# Altium PCB UC-526.PcbDoc (part 1 of 3)
Units mil, origin at the board's own origin, x right, y up, seen from the top; angles counter-clockwise.
Board outline 3149.61 x 3149.61 mil, 2 copper layers (Top Layer, Bottom Layer); 464 components, 208 nets, 2160 pads, 392 vias.
Unrouted connection lines stored in the file: 5.
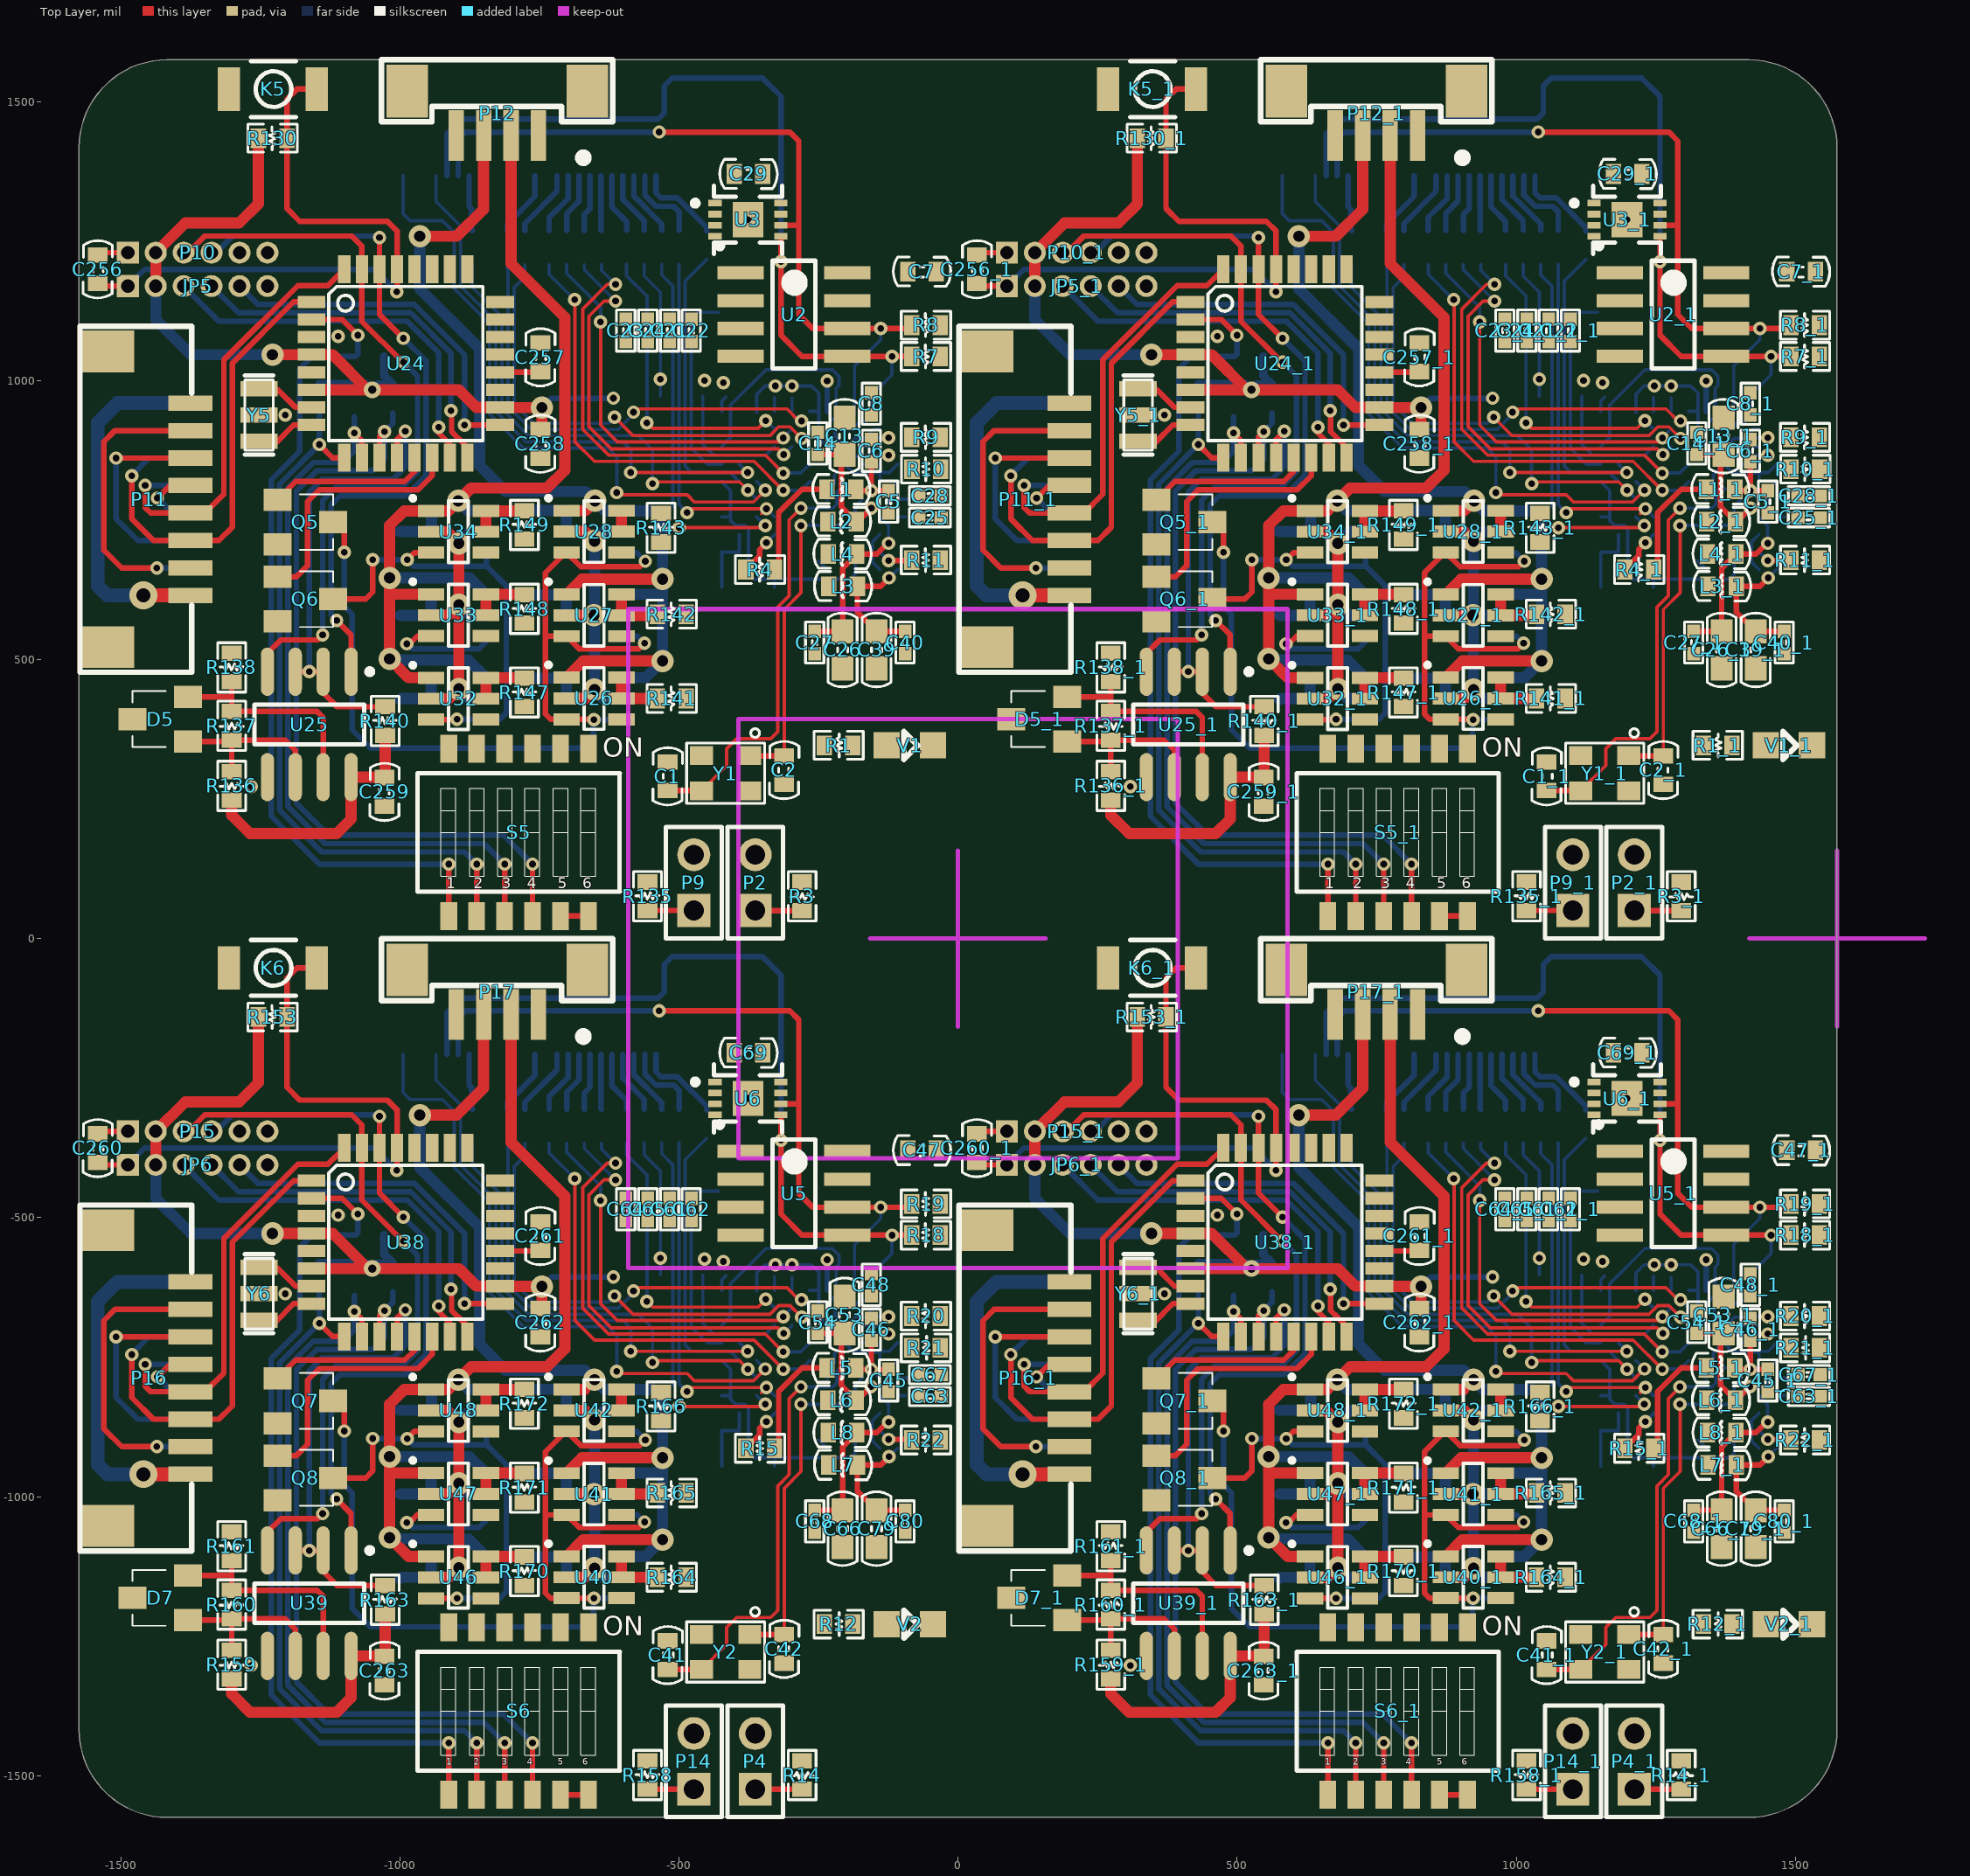
[diagram p0: Top Layer view]
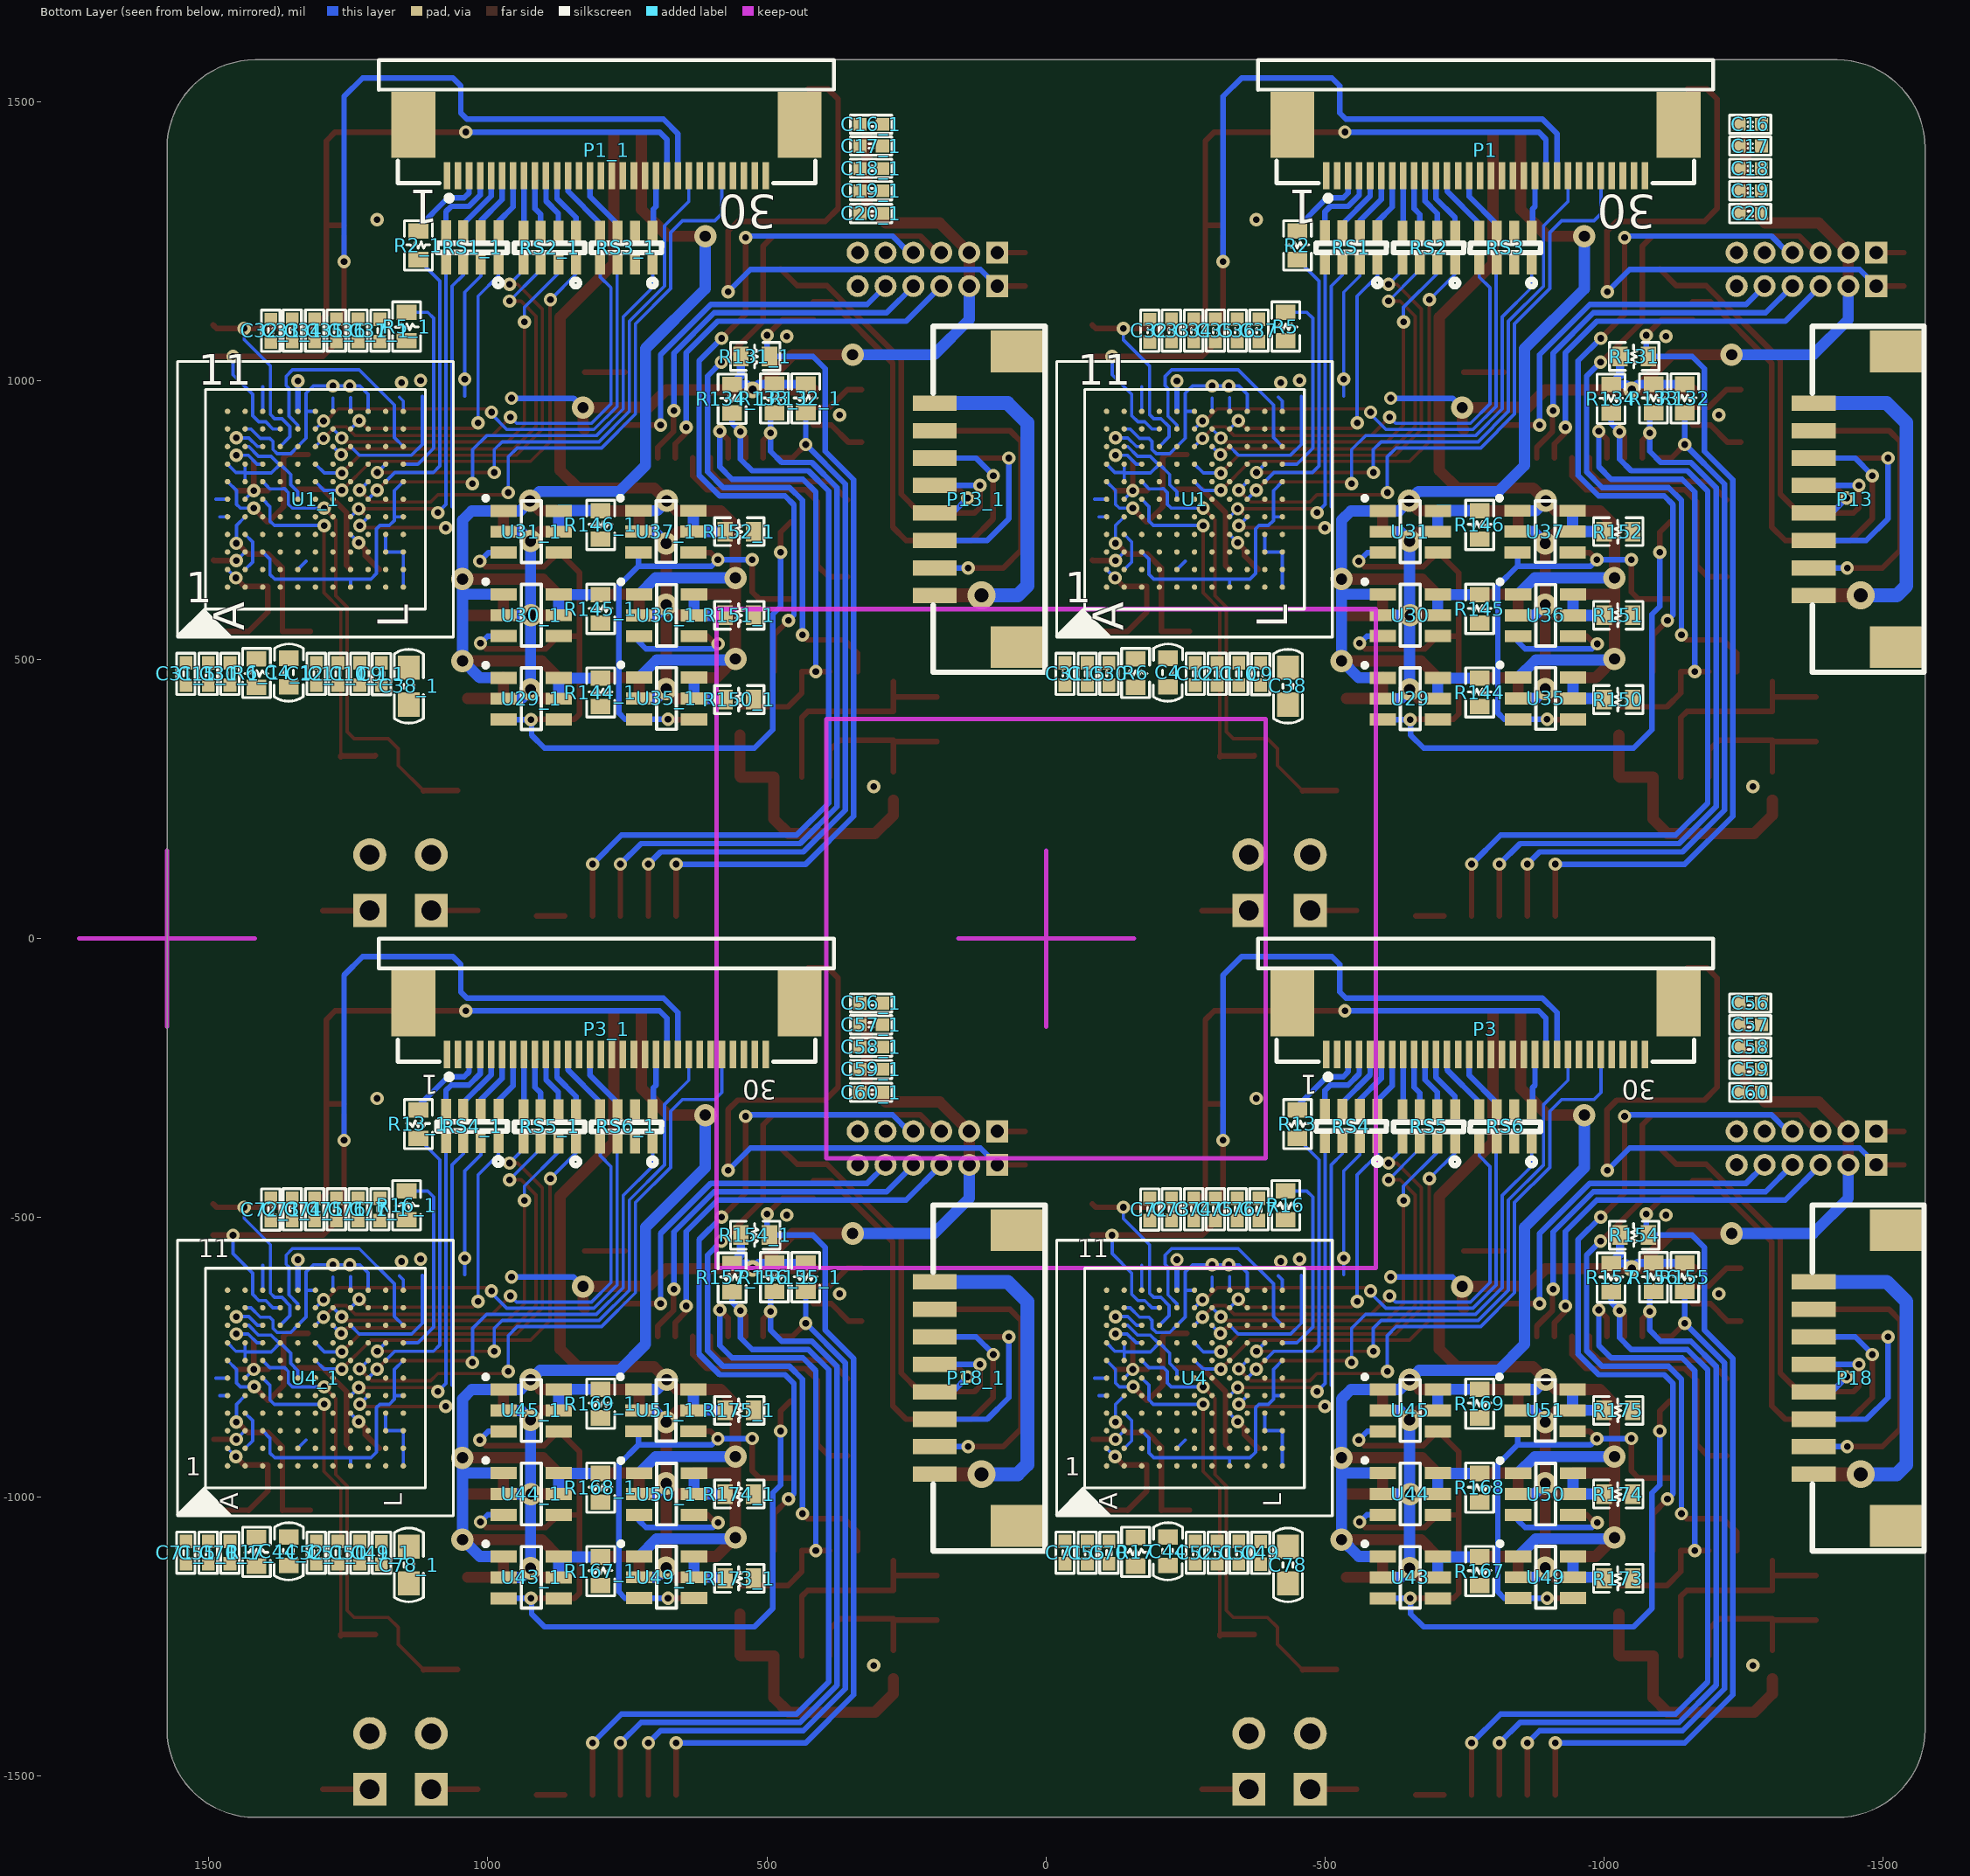
[diagram p1: Bottom Layer view, seen from below]

## Layer stack, top to bottom
Top Layer: signal copper 1.4
Dielectric: dielectric 12.6, FR-4, Dk 4.8
Bottom Layer: signal copper 1.4

## Board outline
-1574.8,-1417.32 -1574.8,1417.32 cw(c-1417.32,1417.32) -1417.32,1574.8 1417.32,1574.8 cw(c1417.32,1417.32) 1574.8,1417.32 1574.8,-1417.32 cw(c1417.32,-1417.32) 1417.32,-1574.8 -1417.32,-1574.8 cw(c-1417.32,-1417.32)

## Design rules (kind name [scope] priority, off if disabled: settings)
Clearance [All] p1: gap=5
DiffPairsRouting [All] p1: maxlimit=10 minlimit=10 mostfreqgap=10 maxuncoupledlength=500
PolygonConnect [All] p1: connectstyle=Relief reliefconductorwidth=10 reliefentries=4 polygonreliefangle="90 Angle"
RoutingVias [All] p1: holewidth=28 width=50 viastyle="Through Hole" minholewidth=28 minwidth=50 maxholewidth=28 maxwidth=50
SilkscreenOverComponentPads [All] p1: minsilkscreentomaskgap=10
SolderMaskExpansion [All] p1: expansion=4
Width [All] p1: maxlimit=50 minlimit=6 preferedwidth=10
26 further rules are at their usual default settings.

## Classes and differential pairs
differential pair USB_DS4_DM: +USB_DS4_DM -USB_DS4_DM
differential pair USB_DS3_DM: +USB_DS3_DM -USB_DS3_DM
differential pair SST: +SST_P -SST_N

## Components (designator, comment, footprint, x,y, rotation, side; value= is the part's Value field where it differs from the comment)
C1 "12pF" 0603S-CAP -520.4,290.81 r270 top
C1_1 "12pF" 0603S-CAP 1054.6,290.81 r270 top (schematic designator C1)
C2 "12pF" 0603S-CAP -311.4,301.99 r90 top
C2_1 "12pF" 0603S-CAP 1263.6,301.99 r90 top (schematic designator C2)
C4 "0.1u" 0603S-CAP -218.4,476.81 r90 bottom
C4_1 "0.1u" 0603S-CAP 1356.6,476.81 r90 bottom (schematic designator C4)
C5 "0.1u" C0402 -124.4,782.99 r270 top
C5_1 "0.1u" C0402 1450.6,782.99 r270 top (schematic designator C5)
C6 "0.01u" C0402 -155.4,874.4 r90 top
C6_1 "0.01u" C0402 1419.6,874.4 r90 top (schematic designator C6)
C7 "0.1uF" 0603S-CAP -64.6,1195.4 r180 top
C7_1 "0.1uF" 0603S-CAP 1510.4,1195.4 r180 top (schematic designator C7)
C8 "0.1u" C0402 -155.4,958.4 r270 top
C8_1 "0.1u" C0402 1419.6,958.4 r270 top (schematic designator C8)
C9 "0.01u" C0402 -384.4,474.09 r270 bottom
C9_1 "0.01u" C0402 1190.6,474.09 r270 bottom (schematic designator C9)
C10 "0.01u" C0402 -345.4,474.4 r270 bottom
C10_1 "0.01u" C0402 1229.6,474.4 r270 bottom (schematic designator C10)
C11 "0.01u" C0402 -306.4,474.4 r270 bottom
C11_1 "0.01u" C0402 1268.6,474.4 r270 bottom (schematic designator C11)
C12 "0.01u" C0402 -267.4,474.4 r270 bottom
C12_1 "0.01u" C0402 1307.6,474.4 r270 bottom (schematic designator C12)
C13 "2.2u" C0805S-CAP -203.4,900.4 r90 top
C13_1 "2.2u" C0805S-CAP 1371.6,900.4 r90 top (schematic designator C13)
C14 "0.1u" C0402 -251.4,887.4 r90 top
C14_1 "0.1u" C0402 1323.6,887.4 r90 top (schematic designator C14)
C15 "0.01u" C0402 -73.9,474.4 r270 bottom
C15_1 "0.01u" C0402 1501.1,474.4 r270 bottom (schematic designator C15)
C16 "0.01u" C0402 -1261.71,1459.25 r180 bottom
C16_1 "0.01u" C0402 313.29,1459.25 r180 bottom (schematic designator C16)
C17 "0.01u" C0402 -1261.71,1420.32 r180 bottom
C17_1 "0.01u" C0402 313.29,1420.32 r180 bottom (schematic designator C17)
C18 "0.01u" C0402 -1261.71,1380.32 r180 bottom
C18_1 "0.01u" C0402 313.29,1380.32 r180 bottom (schematic designator C18)
C19 "0.01u" C0402 -1261.71,1340.32 r180 bottom
C19_1 "0.01u" C0402 313.29,1340.32 r180 bottom (schematic designator C19)
C20 "0.01u" C0402 -1261.71,1299.32 r180 bottom
C20_1 "0.01u" C0402 313.29,1299.32 r180 bottom (schematic designator C20)
C21 "0.1u" C0402 -516.9,1089.71 r90 top
C21_1 "0.1u" C0402 1058.1,1089.71 r90 top (schematic designator C21)
C22 "0.1u" C0402 -477.9,1089.71 r90 top
C22_1 "0.1u" C0402 1097.1,1089.71 r90 top (schematic designator C22)
C23 "0.1u" C0402 -595.32,1089.71 r90 top
C23_1 "0.1u" C0402 979.68,1089.71 r90 top (schematic designator C23)
C24 "0.1u" C0402 -555.9,1089.71 r90 top
C24_1 "0.1u" C0402 1019.1,1089.71 r90 top (schematic designator C24)
C25 "0.1u" C0402 -50.4,754.4 r180 top
C25_1 "0.1u" C0402 1524.6,754.4 r180 top (schematic designator C25)
C26 "22u" C0805S-CAP -206.9,517.4 r270 top
C26_1 "22u" C0805S-CAP 1368.1,517.4 r270 top (schematic designator C26)
C27 "0.1u" C0402 -256.9,530.58 r270 top
C27_1 "0.1u" C0402 1318.1,530.58 r270 top (schematic designator C27)
C28 "0.1u" C0402 -50.4,793.4 r180 top
C28_1 "0.1u" C0402 1524.6,793.4 r180 top (schematic designator C28)
C29 "0.1u" 0603S-CAP -375.4,1370.4 r180 top
C29_1 "0.1u" 0603S-CAP 1199.6,1370.4 r180 top (schematic designator C29)
C30 "0.1u" C0402 -112.82,474.4 r270 bottom
C30_1 "0.1u" C0402 1462.18,474.4 r270 bottom (schematic designator C30)
C31 "0.1u" C0402 -33.9,474.4 r270 bottom
C31_1 "0.1u" C0402 1541.1,474.4 r270 bottom (schematic designator C31)
C32 "0.1u" C0402 -185.9,1089.4 r90 bottom
C32_1 "0.1u" C0402 1389.1,1089.4 r90 bottom (schematic designator C32)
C33 "0.1u" C0402 -224.56,1089.71 r90 bottom
C33_1 "0.1u" C0402 1350.44,1089.71 r90 bottom (schematic designator C33)
C34 "0.1u" C0402 -264.48,1089.71 r90 bottom
C34_1 "0.1u" C0402 1310.52,1089.71 r90 bottom (schematic designator C34)
C35 "0.1u" C0402 -303.48,1089.71 r90 bottom
C35_1 "0.1u" C0402 1271.52,1089.71 r90 bottom (schematic designator C35)
C36 "0.1u" C0402 -342.48,1089.71 r90 bottom
C36_1 "0.1u" C0402 1232.52,1089.71 r90 bottom (schematic designator C36)
C37 "0.1u" C0402 -381.48,1089.71 r90 bottom
C37_1 "0.1u" C0402 1193.52,1089.71 r90 bottom (schematic designator C37)
C38 "22u" C0805S-CAP -433.4,452.4 r270 bottom
C38_1 "22u" C0805S-CAP 1141.6,452.4 r270 bottom (schematic designator C38)
C39 "22u" C0805S-CAP -145.9,517.4 r270 top
C39_1 "22u" C0805S-CAP 1429.1,517.4 r270 top (schematic designator C39)
C40 "0.1u" C0402 -94.9,530.58 r270 top
C40_1 "0.1u" C0402 1480.1,530.58 r270 top (schematic designator C40)
C41 "12pF" 0603S-CAP -520.4,-1283.99 r270 top
C41_1 "12pF" 0603S-CAP 1054.6,-1283.99 r270 top (schematic designator C41)
C42 "12pF" 0603S-CAP -311.4,-1272.81 r90 top
C42_1 "12pF" 0603S-CAP 1263.6,-1272.81 r90 top (schematic designator C42)
C44 "0.1u" 0603S-CAP -218.4,-1097.99 r90 bottom
C44_1 "0.1u" 0603S-CAP 1356.6,-1097.99 r90 bottom (schematic designator C44)
C45 "0.1u" C0402 -124.4,-791.81 r270 top
C45_1 "0.1u" C0402 1450.6,-791.81 r270 top (schematic designator C45)
C46 "0.01u" C0402 -155.4,-700.4 r90 top
C46_1 "0.01u" C0402 1419.6,-700.4 r90 top (schematic designator C46)
C47 "0.1uF" 0603S-CAP -64.6,-379.4 r180 top
C47_1 "0.1uF" 0603S-CAP 1510.4,-379.4 r180 top (schematic designator C47)
C48 "0.1u" C0402 -155.4,-620.4 r270 top
C48_1 "0.1u" C0402 1419.6,-620.4 r270 top (schematic designator C48)
C49 "0.01u" C0402 -384.4,-1100.71 r270 bottom
C49_1 "0.01u" C0402 1190.6,-1100.71 r270 bottom (schematic designator C49)
C50 "0.01u" C0402 -345.4,-1100.4 r270 bottom
C50_1 "0.01u" C0402 1229.6,-1100.4 r270 bottom (schematic designator C50)
C51 "0.01u" C0402 -306.4,-1100.4 r270 bottom
C51_1 "0.01u" C0402 1268.6,-1100.4 r270 bottom (schematic designator C51)
C52 "0.01u" C0402 -267.4,-1100.4 r270 bottom
C52_1 "0.01u" C0402 1307.6,-1100.4 r270 bottom (schematic designator C52)
C53 "2.2u" C0805S-CAP -203.4,-674.4 r90 top
C53_1 "2.2u" C0805S-CAP 1371.6,-674.4 r90 top (schematic designator C53)
C54 "0.1u" C0402 -251.4,-687.4 r90 top
C54_1 "0.1u" C0402 1323.6,-687.4 r90 top (schematic designator C54)
C55 "0.01u" C0402 -73.9,-1100.4 r270 bottom
C55_1 "0.01u" C0402 1501.1,-1100.4 r270 bottom (schematic designator C55)
C56 "0.01u" C0402 -1261.71,-115.56 r180 bottom
C56_1 "0.01u" C0402 313.29,-115.56 r180 bottom (schematic designator C56)
C57 "0.01u" C0402 -1261.71,-154.48 r180 bottom
C57_1 "0.01u" C0402 313.29,-154.48 r180 bottom (schematic designator C57)
C58 "0.01u" C0402 -1261.71,-194.48 r180 bottom
C58_1 "0.01u" C0402 313.29,-194.48 r180 bottom (schematic designator C58)
C59 "0.01u" C0402 -1261.71,-234.48 r180 bottom
C59_1 "0.01u" C0402 313.29,-234.48 r180 bottom (schematic designator C59)
C60 "0.01u" C0402 -1261.71,-275.48 r180 bottom
C60_1 "0.01u" C0402 313.29,-275.48 r180 bottom (schematic designator C60)
C61 "0.1u" C0402 -516.9,-485.09 r90 top
C61_1 "0.1u" C0402 1058.1,-485.09 r90 top (schematic designator C61)
C62 "0.1u" C0402 -477.9,-485.09 r90 top
C62_1 "0.1u" C0402 1097.1,-485.09 r90 top (schematic designator C62)
C63 "0.1u" C0402 -50.4,-820.4 r180 top
C63_1 "0.1u" C0402 1524.6,-820.4 r180 top (schematic designator C63)
C64 "0.1u" C0402 -595.32,-485.09 r90 top
C64_1 "0.1u" C0402 979.68,-485.09 r90 top (schematic designator C64)
C65 "0.1u" C0402 -555.9,-485.09 r90 top
C65_1 "0.1u" C0402 1019.1,-485.09 r90 top (schematic designator C65)
C66 "22u" C0805S-CAP -206.9,-1057.4 r270 top
C66_1 "22u" C0805S-CAP 1368.1,-1057.4 r270 top (schematic designator C66)
C67 "0.1u" C0402 -50.4,-781.4 r180 top
C67_1 "0.1u" C0402 1524.6,-781.4 r180 top (schematic designator C67)
C68 "0.1u" C0402 -256.9,-1044.22 r270 top
C68_1 "0.1u" C0402 1318.1,-1044.22 r270 top (schematic designator C68)
C69 "0.1u" 0603S-CAP -375.4,-204.4 r180 top
C69_1 "0.1u" 0603S-CAP 1199.6,-204.4 r180 top (schematic designator C69)
C70 "0.1u" C0402 -112.82,-1100.4 r270 bottom
C70_1 "0.1u" C0402 1462.18,-1100.4 r270 bottom (schematic designator C70)
C71 "0.1u" C0402 -33.9,-1100.4 r270 bottom
C71_1 "0.1u" C0402 1541.1,-1100.4 r270 bottom (schematic designator C71)
C72 "0.1u" C0402 -185.9,-485.4 r90 bottom
C72_1 "0.1u" C0402 1389.1,-485.4 r90 bottom (schematic designator C72)
C73 "0.1u" C0402 -224.56,-485.09 r90 bottom
C73_1 "0.1u" C0402 1350.44,-485.09 r90 bottom (schematic designator C73)
C74 "0.1u" C0402 -264.48,-485.09 r90 bottom
C74_1 "0.1u" C0402 1310.52,-485.09 r90 bottom (schematic designator C74)
C75 "0.1u" C0402 -303.48,-485.09 r90 bottom
C75_1 "0.1u" C0402 1271.52,-485.09 r90 bottom (schematic designator C75)
C76 "0.1u" C0402 -342.48,-485.09 r90 bottom
C76_1 "0.1u" C0402 1232.52,-485.09 r90 bottom (schematic designator C76)
C77 "0.1u" C0402 -381.48,-485.09 r90 bottom
C77_1 "0.1u" C0402 1193.52,-485.09 r90 bottom (schematic designator C77)
C78 "22u" C0805S-CAP -433.4,-1122.4 r270 bottom
C78_1 "22u" C0805S-CAP 1141.6,-1122.4 r270 bottom (schematic designator C78)
C79 "22u" C0805S-CAP -145.9,-1057.4 r270 top
C79_1 "22u" C0805S-CAP 1429.1,-1057.4 r270 top (schematic designator C79)
C80 "0.1u" C0402 -94.9,-1044.22 r270 top
C80_1 "0.1u" C0402 1480.1,-1044.22 r270 top (schematic designator C80)
C256 "0.1uF" C0603 -1541.4,1199.4 r90 top
C256_1 "0.1uF" C0603 33.6,1199.4 r90 top (schematic designator C256)
C257 "0.1uF" C0603 -748.4,1041.81 r90 top
C257_1 "0.1uF" C0603 826.6,1041.81 r90 top (schematic designator C257)
C258 "0.1uF" C0603 -748.4,886.81 r90 top
C258_1 "0.1uF" C0603 826.6,886.81 r90 top (schematic designator C258)
C259 "0.1u" C0603 -1027.4,263.01 r270 top
C259_1 "0.1u" C0603 547.6,263.01 r270 top (schematic designator C259)
C260 "0.1uF" C0603 -1541.4,-375.4 r90 top
C260_1 "0.1uF" C0603 33.6,-375.4 r90 top (schematic designator C260)
C261 "0.1uF" C0603 -748.4,-532.99 r90 top
C261_1 "0.1uF" C0603 826.6,-532.99 r90 top (schematic designator C261)
C262 "0.1uF" C0603 -748.4,-687.99 r90 top
C262_1 "0.1uF" C0603 826.6,-687.99 r90 top (schematic designator C262)
C263 "0.1u" C0603 -1027.4,-1311.79 r270 top
C263_1 "0.1u" C0603 547.6,-1311.79 r270 top (schematic designator C263)
D5 "SM712" SOT23-3 -1429.4,393.4 r90 top
D5_1 "SM712" SOT23-3 145.6,393.4 r90 top (schematic designator D5)
D7 "SM712" SOT23-3 -1429.4,-1181.4 r90 top
D7_1 "SM712" SOT23-3 145.6,-1181.4 r90 top (schematic designator D7)
JP5 "Header 3X2" MHDR1X6 -1487.4,1169.4 r0 top
JP5_1 "Header 3X2" MHDR1X6 87.6,1169.4 r0 top (schematic designator JP5)
JP6 "Header 3X2" MHDR1X6 -1487.4,-405.4 r0 top
JP6_1 "Header 3X2" MHDR1X6 87.6,-405.4 r0 top (schematic designator JP6)
K5 "SW-PB" 157SW -1306.4,1522.4 r180 top
K5_1 "SW-PB" 157SW 268.6,1522.4 r180 top (schematic designator K5)
K6 "SW-PB" 157SW -1306.4,-52.4 r180 top
K6_1 "SW-PB" 157SW 268.6,-52.4 r180 top (schematic designator K6)
L1 "磁珠" L0603 -208.99,805.4 r180 top
L1_1 "磁珠" L0603 1366.01,805.4 r180 top (schematic designator L1)
L2 "磁珠" L0603 -207.99,747.4 r0 top
L2_1 "磁珠" L0603 1367.01,747.4 r0 top (schematic designator L2)
L3 "磁珠" L0603 -205.99,631.4 r0 top
L3_1 "磁珠" L0603 1369.01,631.4 r0 top (schematic designator L3)
L4 "磁珠" L0603 -206.99,689.4 r0 top
L4_1 "磁珠" L0603 1368.01,689.4 r0 top (schematic designator L4)
L5 "磁珠" L0603 -208.99,-769.4 r180 top
L5_1 "磁珠" L0603 1366.01,-769.4 r180 top (schematic designator L5)
L6 "磁珠" L0603 -207.99,-827.4 r0 top
L6_1 "磁珠" L0603 1367.01,-827.4 r0 top (schematic designator L6)
L7 "磁珠" L0603 -205.99,-943.4 r0 top
L7_1 "磁珠" L0603 1369.01,-943.4 r0 top (schematic designator L7)
L8 "磁珠" L0603 -206.99,-885.4 r0 top
L8_1 "磁珠" L0603 1368.01,-885.4 r0 top (schematic designator L8)
P1 "30PIN" FH12-30S-0.5SH -787.4,1412.95 r180 bottom locked
P1_1 "30PIN" FH12-30S-0.5SH 787.6,1412.95 r180 bottom locked (schematic designator P1)
P2 "Header 2" HDR1X2 -363.4,50.4 r90 top
P2_1 "Header 2" HDR1X2 1211.6,50.4 r90 top (schematic designator P2)
P3 "30PIN" FH12-30S-0.5SH -787.4,-161.85 r180 bottom locked
P3_1 "30PIN" FH12-30S-0.5SH 787.6,-161.85 r180 bottom locked (schematic designator P3)
P4 "Header 2" HDR1X2 -363.4,-1524.4 r90 top
P4_1 "Header 2" HDR1X2 1211.6,-1524.4 r90 top (schematic designator P4)
P9 "Header 2" HDR1X2 -473.4,50.4 r90 top
P9_1 "Header 2" HDR1X2 1101.6,50.4 r90 top (schematic designator P9)
P10 "FTDI Basic" MHDR1X6 -1487.4,1229.4 r0 top
P10_1 "FTDI Basic" MHDR1X6 87.6,1229.4 r0 top (schematic designator P10)
P11 "Header 8" SH_1.25MM*8 -1523.06,787.4 r270 top locked
P11_1 "Header 8" SH_1.25MM*8 51.94,787.4 r270 top locked (schematic designator P11)
P12 "Header 4" SMT_1.25MM*4 -825.4,1479.4 r0 top
P12_1 "Header 4" SMT_1.25MM*4 749.6,1479.4 r0 top (schematic designator P12)
P13 "Header 8" SH_1.25MM*8 -1523.06,787.4 r90 bottom locked
P13_1 "Header 8" SH_1.25MM*8 51.94,787.4 r90 bottom locked (schematic designator P13)
P14 "Header 2" HDR1X2 -473.4,-1524.4 r90 top
P14_1 "Header 2" HDR1X2 1101.6,-1524.4 r90 top (schematic designator P14)
P15 "FTDI Basic" MHDR1X6 -1487.4,-345.4 r0 top
P15_1 "FTDI Basic" MHDR1X6 87.6,-345.4 r0 top (schematic designator P15)
P16 "Header 8" SH_1.25MM*8 -1523.06,-787.4 r270 top locked
P16_1 "Header 8" SH_1.25MM*8 51.94,-787.4 r270 top locked (schematic designator P16)
P17 "Header 4" SMT_1.25MM*4 -825.4,-95.4 r0 top
P17_1 "Header 4" SMT_1.25MM*4 749.6,-95.4 r0 top (schematic designator P17)
P18 "Header 8" SH_1.25MM*8 -1523.06,-787.4 r90 bottom locked
P18_1 "Header 8" SH_1.25MM*8 51.94,-787.4 r90 bottom locked (schematic designator P18)
Q5 "BSS138" "SOT-23 (STANDARD)" -1219.4,786.4 r270 top
Q5_1 "BSS138" "SOT-23 (STANDARD)" 355.6,786.4 r270 top (schematic designator Q5)
Q6 "BSS138" "SOT-23 (STANDARD)" -1219.4,648.4 r270 top
Q6_1 "BSS138" "SOT-23 (STANDARD)" 355.6,648.4 r270 top (schematic designator Q6)
Q7 "BSS138" "SOT-23 (STANDARD)" -1219.4,-788.4 r270 top
Q7_1 "BSS138" "SOT-23 (STANDARD)" 355.6,-788.4 r270 top (schematic designator Q7)
Q8 "BSS138" "SOT-23 (STANDARD)" -1219.4,-926.4 r270 top
Q8_1 "BSS138" "SOT-23 (STANDARD)" 355.6,-926.4 r270 top (schematic designator Q8)
R1 "10K" 0603S-RES -213.99,346.4 r180 top
R1_1 "10K" 0603S-RES 1361.01,346.4 r180 top (schematic designator R1)
R2 "0" 0603S-RES -450.4,1242.4 r270 bottom
R2_1 "0" 0603S-RES 1124.6,1242.4 r270 bottom (schematic designator R2)
R3 "4.7K" 0603S-RES -279.4,75.81 r90 top
R3_1 "4.7K" 0603S-RES 1295.6,75.81 r90 top (schematic designator R3)
R4 "4.7K" 0603S-RES -354.52,661.44 r0 top
R4_1 "4.7K" 0603S-RES 1220.48,661.44 r0 top (schematic designator R4)
R5 "4.7K" 0603S-RES -429.4,1096.93 r90 bottom
R5_1 "4.7K" 0603S-RES 1145.6,1096.93 r90 bottom (schematic designator R5)
R6 "4.7K" 0603S-RES -160.4,475.99 r90 bottom
R6_1 "4.7K" 0603S-RES 1414.6,475.99 r90 bottom (schematic designator R6)
R7 "4.7K" 0603S-RES -57.4,1043.4 r0 top
R7_1 "4.7K" 0603S-RES 1517.6,1043.4 r0 top (schematic designator R7)
R8 "4.7K" 0603S-RES -57.4,1099.4 r0 top
R8_1 "4.7K" 0603S-RES 1517.6,1099.4 r0 top (schematic designator R8)
R9 "0" 0603S-RES -57.4,898.4 r0 top
R9_1 "0" 0603S-RES 1517.6,898.4 r0 top (schematic designator R9)
R10 "6.04K-1%" 0603S-RES -56.99,841.4 r0 top
R10_1 "6.04K-1%" 0603S-RES 1518.01,841.4 r0 top (schematic designator R10)
R11 "200-1%" 0603S-RES -57.4,678.4 r0 top
R11_1 "200-1%" 0603S-RES 1517.6,678.4 r0 top (schematic designator R11)
R12 "10K" 0603S-RES -213.99,-1228.4 r180 top
R12_1 "10K" 0603S-RES 1361.01,-1228.4 r180 top (schematic designator R12)
R13 "0" 0603S-RES -450.4,-332.4 r270 bottom
R13_1 "0" 0603S-RES 1124.6,-332.4 r270 bottom (schematic designator R13)
R14 "4.7K" 0603S-RES -279.4,-1498.99 r90 top
R14_1 "4.7K" 0603S-RES 1295.6,-1498.99 r90 top (schematic designator R14)
R15 "4.7K" 0603S-RES -354.52,-913.36 r0 top
R15_1 "4.7K" 0603S-RES 1220.48,-913.36 r0 top (schematic designator R15)
R16 "4.7K" 0603S-RES -429.4,-477.87 r90 bottom
R16_1 "4.7K" 0603S-RES 1145.6,-477.87 r90 bottom (schematic designator R16)
R17 "4.7K" 0603S-RES -160.4,-1098.81 r90 bottom
R17_1 "4.7K" 0603S-RES 1414.6,-1098.81 r90 bottom (schematic designator R17)
R18 "4.7K" 0603S-RES -57.4,-531.4 r0 top
R18_1 "4.7K" 0603S-RES 1517.6,-531.4 r0 top (schematic designator R18)
R19 "4.7K" 0603S-RES -57.4,-475.4 r0 top
R19_1 "4.7K" 0603S-RES 1517.6,-475.4 r0 top (schematic designator R19)
R20 "0" 0603S-RES -57.4,-676.4 r0 top
R20_1 "0" 0603S-RES 1517.6,-676.4 r0 top (schematic designator R20)
R21 "6.04K-1%" 0603S-RES -57.4,-733.4 r180 top
R21_1 "6.04K-1%" 0603S-RES 1517.6,-733.4 r180 top (schematic designator R21)
R22 "200-1%" 0603S-RES -57.4,-898.4 r0 top
R22_1 "200-1%" 0603S-RES 1517.6,-898.4 r0 top (schematic designator R22)
R130 "10K" R0603 -1227.99,1434.4 r180 top
R130_1 "10K" R0603 347.01,1434.4 r180 top (schematic designator R130)
R131 "10K" R0603 -1053.81,1043.4 r0 bottom
R131_1 "10K" R0603 521.19,1043.4 r0 bottom (schematic designator R131)
R132 "10K" R0603 -1144.4,967.99 r90 bottom
R132_1 "10K" R0603 430.6,967.99 r90 bottom (schematic designator R132)
R133 "10K" R0603 -1088.4,967.99 r90 bottom
R133_1 "10K" R0603 486.6,967.99 r90 bottom (schematic designator R133)
R134 "10K" R0603 -1012.4,967.4 r90 bottom
R134_1 "10K" R0603 562.6,967.4 r90 bottom (schematic designator R134)
R135 "10K" R0603 -556.4,75.81 r90 top
R135_1 "10K" R0603 1018.6,75.81 r90 top (schematic designator R135)
R136 "4.7K" R0603 -1301.4,273.81 r270 top
R136_1 "4.7K" R0603 273.6,273.81 r270 top (schematic designator R136)
R137 "120" R0603 -1301.4,381.4 r270 top
R137_1 "120" R0603 273.6,381.4 r270 top (schematic designator R137)
R138 "4.7K" R0603 -1301.4,485.99 r90 top
R138_1 "4.7K" R0603 273.6,485.99 r90 top (schematic designator R138)
R140 "10K" R0603 -1026.4,389.99 r90 top
R140_1 "10K" R0603 548.6,389.99 r90 top (schematic designator R140)
R141 "5.1" R0603 -512.91,430.4 r180 top
R141_1 "5.1" R0603 1062.09,430.4 r180 top (schematic designator R141)
R142 "5.1" R0603 -512.91,581.4 r180 top
R142_1 "5.1" R0603 1062.09,581.4 r180 top (schematic designator R142)
R143 "5.1" R0603 -532.12,736.4 r90 top
R143_1 "5.1" R0603 1042.88,736.4 r90 top (schematic designator R143)
R144 "5.1" R0603 -776.91,441.19 r90 bottom
R144_1 "5.1" R0603 798.09,441.19 r90 bottom (schematic designator R144)
R145 "5.1" R0603 -776.91,590.85 r90 bottom
R145_1 "5.1" R0603 798.09,590.85 r90 bottom (schematic designator R145)
R146 "5.1" R0603 -776.91,741.44 r90 bottom
R146_1 "5.1" R0603 798.09,741.44 r90 bottom (schematic designator R146)
R147 "5.1" R0603 -776.91,441.19 r90 top
R147_1 "5.1" R0603 798.09,441.19 r90 top (schematic designator R147)
R148 "5.1" R0603 -776.91,590.85 r90 top
R148_1 "5.1" R0603 798.09,590.85 r90 top (schematic designator R148)
R149 "5.1" R0603 -776.91,741.44 r90 top
R149_1 "5.1" R0603 798.09,741.44 r90 top (schematic designator R149)
R150 "5.1" R0603 -1025.32,428.4 r0 bottom
R150_1 "5.1" R0603 549.68,428.4 r0 bottom (schematic designator R150)
R151 "5.1" R0603 -1025.32,579.4 r0 bottom
R151_1 "5.1" R0603 549.68,579.4 r0 bottom (schematic designator R151)
R152 "5.1" R0603 -1025.32,729.4 r0 bottom
R152_1 "5.1" R0603 549.68,729.4 r0 bottom (schematic designator R152)
R153 "10K" R0603 -1227.99,-140.4 r180 top
R153_1 "10K" R0603 347.01,-140.4 r180 top (schematic designator R153)
R154 "10K" R0603 -1053.81,-531.4 r0 bottom
R154_1 "10K" R0603 521.19,-531.4 r0 bottom (schematic designator R154)
R155 "10K" R0603 -1144.4,-606.81 r90 bottom
R155_1 "10K" R0603 430.6,-606.81 r90 bottom (schematic designator R155)
R156 "10K" R0603 -1088.4,-606.81 r90 bottom
R156_1 "10K" R0603 486.6,-606.81 r90 bottom (schematic designator R156)
R157 "10K" R0603 -1012.4,-607.4 r90 bottom
R157_1 "10K" R0603 562.6,-607.4 r90 bottom (schematic designator R157)
R158 "10K" R0603 -556.4,-1498.99 r90 top
R158_1 "10K" R0603 1018.6,-1498.99 r90 top (schematic designator R158)
R159 "4.7K" R0603 -1301.4,-1300.99 r270 top
R159_1 "4.7K" R0603 273.6,-1300.99 r270 top (schematic designator R159)
R160 "120" R0603 -1301.4,-1193.4 r270 top
R160_1 "120" R0603 273.6,-1193.4 r270 top (schematic designator R160)
R161 "4.7K" R0603 -1301.4,-1088.81 r90 top
R161_1 "4.7K" R0603 273.6,-1088.81 r90 top (schematic designator R161)
R163 "10K" R0603 -1026.4,-1184.81 r90 top
R163_1 "10K" R0603 548.6,-1184.81 r90 top (schematic designator R163)
R164 "5.1" R0603 -512.91,-1144.4 r180 top
R164_1 "5.1" R0603 1062.09,-1144.4 r180 top (schematic designator R164)
R165 "5.1" R0603 -512.91,-993.4 r180 top
R165_1 "5.1" R0603 1062.09,-993.4 r180 top (schematic designator R165)
R166 "5.1" R0603 -532.12,-838.4 r90 top
R166_1 "5.1" R0603 1042.88,-838.4 r90 top (schematic designator R166)
R167 "5.1" R0603 -776.91,-1133.61 r90 bottom
R167_1 "5.1" R0603 798.09,-1133.61 r90 bottom (schematic designator R167)
R168 "5.1" R0603 -776.91,-983.95 r90 bottom
R168_1 "5.1" R0603 798.09,-983.95 r90 bottom (schematic designator R168)
R169 "5.1" R0603 -776.91,-833.36 r90 bottom
R169_1 "5.1" R0603 798.09,-833.36 r90 bottom (schematic designator R169)
R170 "5.1" R0603 -776.91,-1133.61 r90 top
R170_1 "5.1" R0603 798.09,-1133.61 r90 top (schematic designator R170)
R171 "5.1" R0603 -776.91,-983.95 r90 top
R171_1 "5.1" R0603 798.09,-983.95 r90 top (schematic designator R171)
R172 "5.1" R0603 -776.91,-833.36 r90 top
R172_1 "5.1" R0603 798.09,-833.36 r90 top (schematic designator R172)
R173 "5.1" R0603 -1025.32,-1146.4 r0 bottom
R173_1 "5.1" R0603 549.68,-1146.4 r0 bottom (schematic designator R173)
R174 "5.1" R0603 -1025.32,-995.4 r0 bottom
R174_1 "5.1" R0603 549.68,-995.4 r0 bottom (schematic designator R174)
R175 "5.1" R0603 -1025.32,-845.4 r0 bottom
R175_1 "5.1" R0603 549.68,-845.4 r0 bottom (schematic designator R175)
RS1 "22" NC06-4 -594.3,1208.24 r0 bottom
RS1_1 "22" NC06-4 980.7,1208.24 r0 bottom (schematic designator RS1)
RS2 "22" NC06-4 -733.07,1207.74 r0 bottom
RS2_1 "22" NC06-4 841.93,1207.74 r0 bottom (schematic designator RS2)
RS3 "22" NC06-4 -870.57,1207.74 r0 bottom
RS3_1 "22" NC06-4 704.43,1207.74 r0 bottom (schematic designator RS3)
RS4 "22" NC06-4 -594.3,-366.57 r0 bottom
RS4_1 "22" NC06-4 980.7,-366.57 r0 bottom (schematic designator RS4)
RS5 "22" NC06-4 -733.07,-367.07 r0 bottom
RS5_1 "22" NC06-4 841.93,-367.07 r0 bottom (schematic designator RS5)
RS6 "22" NC06-4 -870.57,-367.07 r0 bottom
RS6_1 "22" NC06-4 704.43,-367.07 r0 bottom (schematic designator RS6)
S5 "SW DIP-6" DIP_SW_6WAY_SMD -787.4,190.4 r0 top locked
S5_1 "SW DIP-6" DIP_SW_6WAY_SMD 787.6,190.4 r0 top locked (schematic designator S5)
S6 "SW DIP-6" DIP_SW_6WAY_SMD -787.4,-1384.4 r0 top locked
S6_1 "SW DIP-6" DIP_SW_6WAY_SMD 787.6,-1384.4 r0 top locked (schematic designator S6)
U1 "FX3_121_BUMP_0" 121_BGA_FX3 -265.95,787.4 r90 bottom locked
U1_1 "FX3_121_BUMP_0" 121_BGA_FX3 1309.05,787.4 r90 bottom locked (schematic designator U1)
U2 "M24M02-DRMN6TP" SOIC127P600X175-8N -293.98,1118.4 r0 top
U2_1 "M24M02-DRMN6TP" SOIC127P600X175-8N 1281.02,1118.4 r0 top (schematic designator U2)
U3 "ATSHA204-MAH-DA-T" UDFN -376.4,1288.4 r0 top
U3_1 "ATSHA204-MAH-DA-T" UDFN 1198.6,1288.4 r0 top (schematic designator U3)
U4 "FX3_121_BUMP_0" 121_BGA_FX3 -265.95,-787.4 r90 bottom locked
U4_1 "FX3_121_BUMP_0" 121_BGA_FX3 1309.05,-787.4 r90 bottom locked (schematic designator U4)
U5 "M24M02-DRMN6TP" SOIC127P600X175-8N -293.98,-456.4 r0 top
U5_1 "M24M02-DRMN6TP" SOIC127P600X175-8N 1281.02,-456.4 r0 top (schematic designator U5)
U6 "ATSHA204-MAH-DA-T" UDFN -376.4,-286.4 r0 top
U6_1 "ATSHA204-MAH-DA-T" UDFN 1198.6,-286.4 r0 top (schematic designator U6)
U24 "ATMEGA328" TQFP32-08 -989.4,1030.75 r0 top locked
U24_1 "ATMEGA328" TQFP32-08 585.6,1030.75 r0 top locked (schematic designator U24)
U25 "MAX485CSA" SOIC-8 -1162.4,383.89 r270 top
U25_1 "MAX485CSA" SOIC-8 412.6,383.89 r270 top (schematic designator U25)
U26 "AL5802" SOT26 -652.12,430.4 r0 top
U26_1 "AL5802" SOT26 922.88,430.4 r0 top (schematic designator U26)
U27 "AL5802" SOT26 -652.12,579.4 r0 top
U27_1 "AL5802" SOT26 922.88,579.4 r0 top (schematic designator U27)
U28 "AL5802" SOT26 -652.12,729.4 r0 top
U28_1 "AL5802" SOT26 922.88,729.4 r0 top (schematic designator U28)
U29 "AL5802" SOT26 -652.69,430 r180 bottom
U29_1 "AL5802" SOT26 922.31,430 r180 bottom (schematic designator U29)
U30 "AL5802" SOT26 -652.69,579.61 r180 bottom
U30_1 "AL5802" SOT26 922.31,579.61 r180 bottom (schematic designator U30)
U31 "AL5802" SOT26 -652.69,729.21 r180 bottom
U31_1 "AL5802" SOT26 922.31,729.21 r180 bottom (schematic designator U31)
U32 "AL5802" SOT26 -895.12,430 r0 top
U32_1 "AL5802" SOT26 679.88,430 r0 top (schematic designator U32)
U33 "AL5802" SOT26 -895.12,579.61 r0 top
U33_1 "AL5802" SOT26 679.88,579.61 r0 top (schematic designator U33)
U34 "AL5802" SOT26 -895.12,729.21 r0 top
U34_1 "AL5802" SOT26 679.88,729.21 r0 top (schematic designator U34)
U35 "AL5802" SOT26 -895.12,430.4 r180 bottom
U35_1 "AL5802" SOT26 679.88,430.4 r180 bottom (schematic designator U35)
U36 "AL5802" SOT26 -895.12,579.4 r180 bottom
U36_1 "AL5802" SOT26 679.88,579.4 r180 bottom (schematic designator U36)
U37 "AL5802" SOT26 -894.12,729.4 r180 bottom
U37_1 "AL5802" SOT26 680.88,729.4 r180 bottom (schematic designator U37)
U38 "ATMEGA328" TQFP32-08 -989.4,-544.06 r0 top locked
U38_1 "ATMEGA328" TQFP32-08 585.6,-544.06 r0 top locked (schematic designator U38)
U39 "MAX485CSA" SOIC-8 -1162.4,-1190.91 r270 top
U39_1 "MAX485CSA" SOIC-8 412.6,-1190.91 r270 top (schematic designator U39)
U40 "AL5802" SOT26 -652.12,-1144.4 r0 top
U40_1 "AL5802" SOT26 922.88,-1144.4 r0 top (schematic designator U40)
U41 "AL5802" SOT26 -652.12,-995.4 r0 top
U41_1 "AL5802" SOT26 922.88,-995.4 r0 top (schematic designator U41)
U42 "AL5802" SOT26 -652.12,-845.4 r0 top
U42_1 "AL5802" SOT26 922.88,-845.4 r0 top (schematic designator U42)
U43 "AL5802" SOT26 -652.69,-1144.8 r180 bottom
U43_1 "AL5802" SOT26 922.31,-1144.8 r180 bottom (schematic designator U43)
U44 "AL5802" SOT26 -652.69,-995.2 r180 bottom
U44_1 "AL5802" SOT26 922.31,-995.2 r180 bottom (schematic designator U44)
U45 "AL5802" SOT26 -652.69,-845.59 r180 bottom
U45_1 "AL5802" SOT26 922.31,-845.59 r180 bottom (schematic designator U45)
U46 "AL5802" SOT26 -895.12,-1144.8 r0 top
U46_1 "AL5802" SOT26 679.88,-1144.8 r0 top (schematic designator U46)
U47 "AL5802" SOT26 -895.12,-995.2 r0 top
U47_1 "AL5802" SOT26 679.88,-995.2 r0 top (schematic designator U47)
U48 "AL5802" SOT26 -895.12,-845.59 r0 top
U48_1 "AL5802" SOT26 679.88,-845.59 r0 top (schematic designator U48)
U49 "AL5802" SOT26 -895.12,-1144.4 r180 bottom
U49_1 "AL5802" SOT26 679.88,-1144.4 r180 bottom (schematic designator U49)
U50 "AL5802" SOT26 -895.12,-995.4 r180 bottom
U50_1 "AL5802" SOT26 679.88,-995.4 r180 bottom (schematic designator U50)
U51 "AL5802" SOT26 -894.12,-845.4 r180 bottom
U51_1 "AL5802" SOT26 680.88,-845.4 r180 bottom (schematic designator U51)
V1 "Red" LED0805S -86.4,346.4 r0 top
V1_1 "Red" LED0805S 1488.6,346.4 r0 top (schematic designator V1)
V2 "Red" LED0805S -86.4,-1228.4 r0 top
V2_1 "Red" LED0805S 1488.6,-1228.4 r0 top (schematic designator V2)
Y1 "19.2MHZ" "爱普生晶振3.2×2.5MM - 无源" -416.4,296.4 r180 top
Y1_1 "19.2MHZ" "爱普生晶振3.2×2.5MM - 无源" 1158.6,296.4 r180 top (schematic designator Y1)
Y2 "19.2MHZ" "爱普生晶振3.2×2.5MM - 无源" -416.4,-1278.4 r180 top
Y2_1 "19.2MHZ" "爱普生晶振3.2×2.5MM - 无源" 1158.6,-1278.4 r180 top (schematic designator Y2)
Y5 "16MHz" RESONATOR-SMD -1252.4,938.4 r90 top
Y5_1 "16MHz" RESONATOR-SMD 322.6,938.4 r90 top (schematic designator Y5)
Y6 "16MHz" RESONATOR-SMD -1252.4,-636.4 r90 top
Y6_1 "16MHz" RESONATOR-SMD 322.6,-636.4 r90 top (schematic designator Y6)

## Footprints (in the part's own frame and the unit in brackets; to place one, negate y for a bottom-side part, rotate by r counter-clockwise, add the part's x,y. Pads: shape width x height; smd on the part's side, far side on the other; paste and mask are expansions set on the pad)
121_BGA_FX3 [mil]
  round 9.85 smd: A1(-157.45,157.45) A2(-125.96,157.45) A3(-94.47,157.45) A4(-62.98,157.45) A5(-31.49,157.45) A6(0,157.45) A7(31.49,157.45) A8(62.98,157.45) A9(94.47,157.45) A10(125.96,157.45) A11(157.45,157.45) B1(-157.45,125.96) B2(-125.96,125.96) B3(-94.47,125.96) B4(-62.98,125.96) B5(-31.49,125.96) B6(0,125.96) B7(31.49,125.96) B8(62.98,125.96) B9(94.47,125.96) B10(125.96,125.96) B11(157.45,125.96) C1(-157.45,94.47) C2(-125.96,94.47) C3(-94.47,94.47) C4(-62.98,94.47) C5(-31.49,94.47) C6(0,94.47) C7(31.49,94.47) C8(62.98,94.47) C9(94.47,94.47) C10(125.96,94.47) C11(157.45,94.47) D1(-157.45,62.98) D2(-125.96,62.98) D3(-94.47,62.98) D4(-62.98,62.98) D5(-31.49,62.98) D6(0,62.98) D7(31.49,62.98) D8(62.98,62.98) D9(94.47,62.98) D10(125.96,62.98) D11(157.45,62.98) E1(-157.45,31.49) E2(-125.96,31.49) E3(-94.47,31.49) E4(-62.98,31.49) E5(-31.49,31.49) E6(0,31.49) E7(31.49,31.49) E8(62.98,31.49) E9(94.47,31.49) E10(125.96,31.49) E11(157.45,31.49) F1(-157.45,0) F2(-125.96,0) F3(-94.47,0) F4(-62.98,0) F5(-31.49,0) F6(0,0) F7(31.49,0) F8(62.98,0) F9(94.47,0) F10(125.96,0) F11(157.45,0) G1(-157.45,-31.49) G2(-125.96,-31.49) G3(-94.47,-31.49) G4(-62.98,-31.49) G5(-31.49,-31.49) G6(0,-31.49) G7(31.49,-31.49) G8(62.98,-31.49) G9(94.47,-31.49) G10(125.96,-31.49) G11(157.45,-31.49) H1(-157.45,-62.98) H2(-125.96,-62.98) H3(-94.47,-62.98) H4(-62.98,-62.98) H5(-31.49,-62.98) H6(0,-62.98) H7(31.49,-62.98) H8(62.98,-62.98) H9(94.47,-62.98) H10(125.96,-62.98) H11(157.45,-62.98) J1(-157.45,-94.47) J2(-125.96,-94.47) J3(-94.47,-94.47) J4(-62.98,-94.47) J5(-31.49,-94.47) J6(0,-94.47) J7(31.49,-94.47) J8(62.98,-94.47) J9(94.47,-94.47) J10(125.96,-94.47) J11(157.45,-94.47) K1(-157.45,-125.96) K2(-125.96,-125.96) K3(-94.47,-125.96) K4(-62.98,-125.96) K5(-31.49,-125.96) K6(0,-125.96) K7(31.49,-125.96) K8(62.98,-125.96) K9(94.47,-125.96) K10(125.96,-125.96) K11(157.45,-125.96) L1(-157.45,-157.45) L2(-125.96,-157.45) L3(-94.47,-157.45) L4(-62.98,-157.45) L5(-31.49,-157.45) L6(0,-157.45) L7(31.49,-157.45) L8(62.98,-157.45) L9(94.47,-157.45) L10(125.96,-157.45) L11(157.45,-157.45)
  silkscreen extent -247,-247 247,250
157SW [mil]
  rect 40x78 smd: 1(0,0) 2(-157.5,0)
  silkscreen extent -120,-50 -40,50
0603S-CAP [mm]
  rect 0.7x0.9 smd: 1(-0.65,0) 2(0.65,0)
  silkscreen extent -1.31,-0.67 1.31,0.67
0603S-RES [mm]
  rect 0.7x0.9 smd: 1(-0.65,0) 2(0.65,0)
  silkscreen extent -1.12,-0.64 1.12,0.64
C0402 [mil]
  rect 24x23 smd: 1(-20,0) 2(20,0)
  silkscreen extent -37,-17 37,17, body extent -20,-10 19,10, height 20
C0603 [mm]
  rect 0.7x0.9 smd: 1(0.65,0) 2(-0.65,0)
  silkscreen extent -1.31,-0.67 1.31,0.67
C0805S-CAP [mm]
  rect 1.1x1 smd: 1(0.838,0) 2(-0.838,0)
  silkscreen extent -1.68,-0.66 1.68,0.66
DIP_SW_6WAY_SMD [mm]
  rect 0.76x1.27 smd: 1(-3.175,-3.81) 2(-1.905,-3.81) 3(-0.635,-3.81) 4(0.635,-3.81) 5(1.905,-3.81) 6(3.175,-3.81) 7(3.175,3.81) 8(1.905,3.81) 9(0.635,3.81) 10(-0.635,3.81) 11(-1.905,3.81) 12(-3.175,3.81)
  silkscreen extent -4.6,-2.7 4.6,2.7
FH12-30S-0.5SH [mm]
  rect 0.3x1.25 smd: 1(-7.25,-1.162) 2(-6.75,-1.162) 3(-6.25,-1.162) 4(-5.75,-1.162) 5(-5.25,-1.162) 6(-4.75,-1.162) 7(-4.25,-1.162) 8(-3.75,-1.162) 9(-3.25,-1.162) 10(-2.75,-1.162) 11(-2.25,-1.162) 12(-1.75,-1.162) 13(-1.25,-1.162) 14(-0.75,-1.162) 15(-0.25,-1.162) 16(0.25,-1.162) 17(0.75,-1.162) 18(1.25,-1.162) 19(1.75,-1.162) 20(2.25,-1.162) 21(2.75,-1.162) 22(3.25,-1.162) 23(3.75,-1.162) 24(4.25,-1.162) 25(4.75,-1.162) 26(5.25,-1.162) 27(5.75,-1.162) 28(6.25,-1.162) 29(6.75,-1.162) 30(7.25,-1.162)
  rect 2x3 smd: 31(-8.79,1.163) 31(8.79,1.163)
  silkscreen extent -10.35,-2.31 10.35,4.11
HDR1X2 [mm]
  rect 1.5x1.5 hole 0.9: 1(0,0)
  round 1.5 hole 0.9: 2(2.54,0)
  silkscreen extent -1.27,-1.27 3.81,1.27
L0603 [mm]
  rect 0.7x0.9 smd: 1(-0.65,0) 2(0.65,0)
  silkscreen extent -1.31,-0.67 1.31,0.67
LED0805S [mm]
  rect 1.2x1.2 smd: 1(-1.05,0) 2(1.05,0)
  silkscreen extent -0.27,-0.64 0.36,0.63, body extent -0.98,-0.46 1.08,0.45, height 0.85
MHDR1X6 [mm]
  rect 1x1 hole 0.6: 1(0,0)
  round 1 hole 0.6: 2(1.27,0) 3(2.54,0) 4(3.81,0) 5(5.08,0) 6(6.35,0)
NC06-4 [mil]
  rect 18x36 smd: 1(94.4,-0.16) 2(63.39,-0.16) 3(31.9,-0.16) 4(0.4,-0.16) 5(0.4,-61.16) 6(31.9,-61.16) 7(63.39,-61.16) 8(94.4,-61.16)
  silkscreen extent -16,-38 111,40
R0603 [mm]
  rect 0.7x0.9 smd: 1(0.65,0) 2(-0.65,0)
  silkscreen extent -1.12,-0.64 1.12,0.64
RESONATOR-SMD [mm]
  rect 0.7x1.7 smd: 1(-1.2,0) 2(0,0) 3(1.2,0)
  silkscreen extent -1.8,-0.65 1.8,0.65
SH_1.25MM*8 [mm]
  rect 0.7x2 smd: 1(-4.375,3.75) 2(-3.125,3.75) 3(-1.875,3.75) 4(-0.625,3.75) 5(0.625,3.75) 6(1.875,3.75) 7(3.125,3.75) 8(4.375,3.75)
  rect 1.9x2.4 smd: 9(-6.731,0) 9(6.731,0)
  silkscreen extent -7.87,-1.27 7.87,3.81
SMT_1.25MM*4 [mm]
  rect 0.7x2.3 smd: 1(1.875,-1.025) 2(0.625,-1.025) 3(-0.625,-1.025) 4(-1.875,-1.025)
  rect 1.9x2.4 smd: 7(-4.1,1) 7(4.1,1)
  silkscreen extent -5.28,-2.16 5.25,2.42
SOIC127P600X175-8N [mm]
  rect 2.1x0.6 smd: 1(-2.425,1.905) 2(-2.425,0.635) 3(-2.425,-0.635) 4(-2.425,-1.905) 5(2.425,-1.905) 6(2.425,-0.635) 7(2.425,0.635) 8(2.425,1.905)
  silkscreen extent -3.5,-2.45 0.98,3.25, body extent -1.95,-2.45 1.95,2.45, height 1.75
SOIC-8 [mm]
  oval 2.2x0.6 smd: 1(-2.4,1.905) 2(-2.4,0.635) 3(-2.4,-0.635) 4(-2.4,-1.905) 5(2.4,-1.905) 6(2.4,-0.635) 7(2.4,0.635) 8(2.4,1.905)
  silkscreen extent -2.52,-2.5 0.9,2.88, body extent -2,-2.5 2,2.5, height 1.75
SOT23-3 [mil]
  rect 40x50 smd: 1(40,-50) 2(-40,-50) 3(0,50)
  silkscreen extent -50,-10 50,50, body extent -59,-52 59,46, height 42
SOT26 [mm]
  rect 1.2x0.55 smd: 1(-1.25,0.95) 2(-1.25,0) 3(-1.25,-0.95) 4(1.25,-0.95) 5(1.25,0) 6(1.25,0.95)
  silkscreen extent -2.17,-1.4 0.45,1.62
"SOT-23 (STANDARD)" [mil]
  rect 40x50 smd: D(40,100) G(0,0) S(80,0)
  silkscreen extent -10,40 90,100, body extent -19,-2 99,96, height 42
TQFP32-08 [mil]
  rect 50x22 smd: 1(-169,110.24) 2(-169,78.74) 3(-169,47.25) 4(-169,15.75) 5(-169,-15.74) 6(-169,-47.24) 7(-169,-78.74) 8(-169,-110.24) 17(169.01,-110.23) 18(169,-78.73) 19(169,-47.24) 20(169,-15.74) 21(169,15.75) 22(169,47.25) 23(169,78.74) 24(169,110.24)
  rect 22x50 smd: 9(-110.24,-169) 10(-78.74,-169) 11(-47.24,-168.99) 12(-15.74,-169) 13(15.75,-169) 14(47.25,-169) 15(78.74,-169) 16(110.24,-169) 25(110.24,169) 26(78.74,169) 27(47.25,169) 28(15.75,169) 29(-15.75,169) 30(-47.24,169) 31(-78.73,169) 32(-110.23,169)
  silkscreen extent -138,-138 138,138
UDFN [mm]
  rect 0.6x0.3 smd: 1(-1.5,0.75) 2(-1.5,0.25) 3(-1.5,-0.25) 4(-1.5,-0.75) 5(1.5,-0.75) 6(1.5,-0.25) 7(1.5,0.25) 8(1.5,0.75)
  rect 1.4x1.6 smd: 4(0,0)
  silkscreen extent -2.52,-1.55 1.55,1.55, body extent -1.5,-1 1.52,1, height 0.6
"爱普生晶振3.2×2.5MM - 无源" [mm]
  rect 1.05x0.85 smd: 1(-1.1,-0.8) 2(1.1,0.8) 3(1.1,-0.8) 4(-1.1,0.8)
  Top Layer pour cut-out: -1.778,1.372 -1.778,-1.372 1.778,-1.372 1.778,1.372
  silkscreen extent -1.78,-2.03 1.78,1.37

## Part data
C1 C1_1 C2 C2_1 C41 C41_1 C42 C42_1: library part "CAP CER SMT 4.3pF 0805", "CAP CER SMT 4.3pF 0805"
C4 C4_1 C44 C44_1: library part Cap, "50V/8.2u/0805"
C5 C5_1 C6 C6_1 C8 C8_1 C9 C9_1 C10 C10_1 C11 C11_1 C12 C12_1 C13 C13_1 C14 C14_1 C15 C15_1 C16 C16_1 C17 C17_1 C18 C18_1 C19 C19_1 C20 C20_1 C21 C21_1 C22 C22_1 C23 C23_1 C24 C24_1 C25 C25_1 C26 C26_1 C27 C27_1 C28 C28_1 C30 C30_1 C31 C31_1 C32 C32_1 C33 C33_1 C34 C34_1 C35 C35_1 C36 C36_1 C37 C37_1 C38 C38_1 C39 C39_1 C40 C40_1 C45 C45_1 C46 C46_1 C48 C48_1 C49 C49_1 C50 C50_1 C51 C51_1 C52 C52_1 C53 C53_1 C54 C54_1 C55 C55_1 C56 C56_1 C57 C57_1 C58 C58_1 C59 C59_1 C60 C60_1 C61 C61_1 C62 C62_1 C63 C63_1 C64 C64_1 C65 C65_1 C66 C66_1 C67 C67_1 C68 C68_1 C70 C70_1 C71 C71_1 C72 C72_1 C73 C73_1 C74 C74_1 C75 C75_1 C76 C76_1 C77 C77_1 C78 C78_1 C79 C79_1 C80 C80_1: library part CAP0805, "Capacitor"
C7 C7_1 C47 C47_1: library part "CAP SMT 0.1uF 16V X7R", "CAP SMT 0.1uF 16V X7R"
C29 C29_1 C69 C69_1: library part CAP, "RC=1206"
C256 C256_1 C257 C257_1 C258 C258_1 C260 C260_1 C261 C261_1 C262 C262_1: library part "CAP SMT C100nF25V10%X7R", "Capacitor"
C259 C259_1 C263 C263_1: library part Cap, "Capacitor"
JP5 JP5_1 JP6 JP6_1: "Header, 3-Pin, Dual row"
K5 K5_1 K6 K6_1: "Switch"
L1 L1_1 L2 L2_1 L3 L3_1 L4 L4_1 L5 L5_1 L6 L6_1 L7 L7_1 L8 L8_1: library part Inductor, "Inductor"
P1 P1_1 P3 P3_1: library part "Header 30", "Header, 30-Pin"
P2 P2_1 P4 P4_1 P9 P9_1 P14 P14_1: "Header, 2-Pin"
P10 P10_1 P15 P15_1: library part ARDUINO_SERIAL_PROGRAMPTH
P11 P11_1 P13 P13_1 P16 P16_1 P18 P18_1: "Header, 8-Pin"
P12 P12_1 P17 P17_1: "Header, 4-Pin"
Q5 Q5_1 Q6 Q6_1 Q7 Q7_1 Q8 Q8_1: library part NMOS
R1 R1_1 R2 R2_1 R3 R3_1 R4 R4_1 R5 R5_1 R6 R6_1 R7 R7_1 R8 R8_1 R9 R9_1 R10 R10_1 R11 R11_1 R12 R12_1 R13 R13_1 R14 R14_1 R15 R15_1 R16 R16_1 R17 R17_1 R18 R18_1 R19 R19_1 R20 R20_1 R21 R21_1 R22 R22_1 R130 R130_1 R131 R131_1 R132 R132_1 R133 R133_1 R134 R134_1 R135 R135_1 R136 R136_1 R137 R137_1 R138 R138_1 R140 R140_1 R141 R141_1 R142 R142_1 R143 R143_1 R144 R144_1 R145 R145_1 R146 R146_1 R147 R147_1 R148 R148_1 R149 R149_1 R150 R150_1 R151 R151_1 R152 R152_1 R153 R153_1 R154 R154_1 R155 R155_1 R156 R156_1 R157 R157_1 R158 R158_1 R159 R159_1 R160 R160_1 R161 R161_1 R163 R163_1 R164 R164_1 R165 R165_1 R166 R166_1 R167 R167_1 R168 R168_1 R169 R169_1 R170 R170_1 R171 R171_1 R172 R172_1 R173 R173_1 R174 R174_1 R175 R175_1: library part Res2, "Resistor"
RS1 RS1_1 RS2 RS2_1 RS3 RS3_1 RS4 RS4_1 RS5 RS5_1 RS6 RS6_1: library part RN4
S5 S5_1 S6 S6_1: "DIP Switch, 6 Position, SPST"
U2 U2_1 U5 U5_1: library part 24LC64-I/SN, "IC EEPROM 64KBIT 400KHZ 8SOIC"
U3 U3_1 U6 U6_1: library part AT24C128
U24 U24_1 U38 U38_1: library part ATMEGA168
U25 U25_1 U39 U39_1: library part MAX3485CSA
V1 V1_1 V2 V2_1: library part LED0, "Typical INFRARED GaAs LED"
Y1 Y1_1 Y2 Y2_1: library part "XTAL 32.768KHZ", "Crystal, CRYSTAL 32.768KHZ 6PF SMD"
Y5 Y5_1 Y6 Y6_1: library part RESONATORSMD

## Via types
v1: diameter 24, hole 12, Top Layer to Bottom Layer, tented both sides, 320 vias
v2: diameter 40, hole 20, Top Layer to Bottom Layer, tented both sides, 60 vias
v3: diameter 30, hole 15, Top Layer to Bottom Layer, tented both sides, 4 vias
v4: diameter 50, hole 25, Top Layer to Bottom Layer, tented both sides, 4 vias
v5: diameter 24, hole 12, Top Layer to Bottom Layer, 4 vias

## Nets (pads, with @x,y where several pads share a name; then routed paths per layer and width w, separated by ;. In a path a pad name is that pad's centre, name@x,y a point inside that pad or via, vN(x,y) a via of type N, cw(c..) or ccw(c..) an arc to the next point about the centre after c; other vN are vias at no path point)
A0: U24.23 U38.23
A1: U24.24 U38.24
A2: U24.25 U38.25
A3: U24.26 U38.26
A4: U24.27 U38.27
A5: U24.28 U38.28
A6: U24.19 U38.19
A7: U24.22 U38.22
AD1: R131.2 R154.2 S5.1 S6.1 U24.2 U38.2 | length 3029.1
  Top Layer w10: U38.2@-1158.4,-465.32 -1103.49,-465.32 v1(-1075.4,-493.4) ; U24.2@-1158.4,1109.49 -1103.49,1109.49 v1(-1075.4,1081.4) ; S6.1@-912.4,-1534.4 v1(-912.4,-1441.4) ; S5.1@-912.4,40.4 v1(-912.4,133.4)
  Bottom Layer w10: v1@-1074.4,-494.4 v1(-1075.4,-493.4) -1075.4,-527.4 R154.2@-1079.4,-531.4 -1153.4,-531.4 -1157.4,-531.4 -1179.4,-553.4 -1179.4,-701.4 -1230.4,-752.4 -1230.4,-1355.4 -1144.4,-1441.4 v1(-912.4,-1441.4) ; v1@-1074.4,1080.4 v1(-1075.4,1081.4) -1075.4,1047.4 R131.2@-1079.4,1043.4 -1153.4,1043.4 -1157.4,1043.4 -1179.4,1021.4 -1179.4,873.4 -1230.4,822.4 -1230.4,219.4 -1144.4,133.4 v1(-912.4,133.4)
AD2: R132.2 R155.2 S5.2 S6.2 U24.9 U38.9 | length 2564.5
  Top Layer w10: v1(-1144.4,-689.4) -1120.75,-713.06 U38.9@-1099.64,-713.06 ; v1(-1144.4,885.4) -1120.75,861.75 U24.9@-1099.64,861.75 ; S6.2@-862.4,-1534.4 v1(-862.4,-1441.4) ; S5.2@-862.4,40.4 v1(-862.4,133.4)
  Bottom Layer w10: R155.2@-1144.4,-632.4 v1(-1144.4,-689.4) -1144.61,-689.4 -1215.4,-760.19 -1215.4,-1344.4 -1140.4,-1419.4 -884.4,-1419.4 v1(-862.4,-1441.4) ; R132.2@-1144.4,942.4 v1(-1144.4,885.4) -1144.61,885.4 -1215.4,814.61 -1215.4,230.4 -1140.4,155.4 -884.4,155.4 v1(-862.4,133.4)
AD3: R133.2 R156.2 S5.3 S6.3 U24.10 U38.10 | length 2707.2
  Top Layer w10: v1(-1081.4,-668.4) -1068.14,-681.66 U38.10@-1068.14,-713.06 ; v1(-1081.4,906.4) -1068.14,893.14 U24.10@-1068.14,861.75 ; S6.3@-812.4,-1534.4 v1(-812.4,-1441.4) ; S5.3@-812.4,40.4 v1(-812.4,133.4)
  Bottom Layer w10: R156.2@-1081.4,-639.4 v1(-1081.4,-668.4) -1081.4,-701.4 -1101.4,-721.4 -1112.4,-721.4 -1155.4,-721.4 -1200.4,-766.4 -1200.4,-1338.19 -1134.19,-1404.4 -849.4,-1404.4 v1(-812.4,-1441.4) ; R133.2@-1081.4,935.4 v1(-1081.4,906.4) -1081.4,873.4 -1101.4,853.4 -1112.4,853.4 -1155.4,853.4 -1200.4,808.4 -1200.4,236.61 -1134.19,170.4 -849.4,170.4 v1(-812.4,133.4)
AD4: R134.2 R157.2 S5.4 S6.4 U24.11 U38.11 | length 2883
  Top Layer w10: U38.11@-1036.64,-713.05 -1036.64,-675.64 v1(-1027.4,-666.4) ; U24.11@-1036.64,861.75 -1036.64,899.16 v1(-1027.4,908.4) ; S6.4@-762.4,-1534.4 v1(-762.4,-1441.4) ; S5.4@-762.4,40.4 v1(-762.4,133.4)
  Bottom Layer w10: R157.2@-1012.4,-632.99 -1012.4,-651.4 v1(-1027.4,-666.4) -1027.4,-715.4 -1048.4,-736.4 -1149.19,-736.4 -1185.4,-772.61 -1185.4,-1331.98 -1127.98,-1389.4 -814.4,-1389.4 v1(-762.4,-1441.4) ; R134.2@-1012.4,941.81 -1012.4,923.4 v1(-1027.4,908.4) -1027.4,859.4 -1048.4,838.4 -1149.19,838.4 -1185.4,802.19 -1185.4,242.83 -1127.98,185.4 -814.4,185.4 v1(-762.4,133.4)
AREF: C257.2 C261.2 U24.20 U38.20 | length 144
  Top Layer w10: U38.20@-820.4,-559.8 C261.2@-748.4,-559.8 ; U24.20@-820.4,1015 C257.2@-748.4,1015
AVDD: C13.2 C14.1 C53.2 C54.1 L2.2 L6.2 U1.A7 U4.A7 | length 598.1
  Top Layer w10: C54.1@-252.4,-707.4 -214.58,-707.4 -208.99,-712.99 -208.99,-800.81 L6.2@-182.4,-827.4 -180.48,-827.4 v1(-156.22,-803.15) ; C14.1@-252.4,867.4 -214.58,867.4 -208.99,861.81 -208.99,833.4 ; -208.99,839.81 -208.99,833.4 ; v1(-155.4,771.4) -179.4,747.4 L2.2@-182.4,747.4 -208.99,773.99 -208.99,833.4
  Bottom Layer w6: v1(-156.22,-803.15) -161.66,-803.15 -161.66,-801.4 -155.4,-801.4 -153.4,-803.4 -131.4,-803.4 -124.4,-796.4 -124.4,-771.81 U4.A7@-108.5,-755.91 ; v1(-155.4,771.4) -131.4,771.4 -124.4,778.4 -124.4,802.99 U1.A7@-108.5,818.89
CLK_OUT: U1.D6 U4.D6
D0_IO: P1.18 P3.18
D1_IO: P1.17 P3.17
D2: P11.5 P13.5 P16.5 P18.5 S5.8 S6.8 U24.32 U38.32 | length 1611.7
  Top Layer w10: v1@-1456.4,-762.4 -1456.4,-802.4 -1446.8,-812.01 P16.5@-1375.43,-812.01 ; v1@-1456.4,812.4 -1456.4,772.4 -1446.8,762.8 P11.5@-1375.43,762.8 ; P16.5@-1374.03,-813.4 P16.5@-1375.43,-812.01 ; P11.5@-1374.03,761.4 P11.5@-1375.43,762.8 ; U38.32@-1099.63,-375.05 -1128.98,-404.4 -1182.4,-404.4 -1315.4,-537.4 -1315.4,-778.4 -1349.01,-812.01 P16.5@-1375.43,-812.01 ; U24.32@-1099.63,1199.75 -1128.98,1170.4 -1182.4,1170.4 -1315.4,1037.4 -1315.4,796.4 -1349.01,762.8 P11.5@-1375.43,762.8
  Bottom Layer w10: v1(-1456.4,-762.8) P18.5@-1375.43,-762.8 ; v1(-1456.4,812.01) P13.5@-1375.43,812.01
D2_IO: P1.16 P3.16
D3: P11.6 P13.6 P16.6 P18.6 S5.7 S6.7 U24.1 U38.1 | length 1765.9
  Top Layer w10: v1@-1480.4,-744.4 -1480.4,-822.4 -1441.58,-861.22 P16.6@-1375.43,-861.22 -1324.22,-861.22 -1300.4,-837.4 -1300.4,-543.61 -1190.61,-433.82 U38.1@-1158.4,-433.82 ; v1@-1480.4,830.4 -1480.4,752.4 -1441.58,713.58 P11.6@-1375.43,713.58 -1324.22,713.58 -1300.4,737.4 -1300.4,1031.19 -1190.61,1140.98 U24.1@-1158.4,1140.98
  Bottom Layer w10: v1@-1480.4,-744.4 -1449.58,-713.58 P18.6@-1375.43,-713.58 ; v1@-1480.4,830.4 -1449.58,861.22 P13.6@-1375.43,861.22
  other v1: -1480.4,-745.4 -1480.4,829.4
D3_IO: P1.15 P3.15
D4_IO: P1.14 P3.14 RS3.7 RS6.7 | length 237.4
  Bottom Layer w10: RS6.7@-807.18,-305.9 -807.18,-294.18 -757.87,-244.87 P3.14@-757.87,-207.62 ; RS3.7@-807.18,1268.9 -807.18,1280.63 -757.87,1329.93 P1.14@-757.87,1367.19
D5_IO: P1.12 P3.12 RS3.8 RS6.8 | length 244.3
  Bottom Layer w10: RS6.8@-776.17,-305.9 -776.17,-293.17 -718.5,-235.5 P3.12@-718.5,-207.62 ; RS3.8@-776.17,1268.9 -776.17,1281.63 -718.5,1339.3 P1.12@-718.5,1367.19
D6_IO: P1.11 P3.11 RS2.5 RS5.5 | length 224.6
  Bottom Layer w10: RS5.5@-732.66,-305.9 -732.66,-282.66 -698.82,-248.82 P3.11@-698.82,-207.62 ; RS2.5@-732.66,1268.9 -732.66,1292.14 -698.82,1325.98 P1.11@-698.82,1367.19
D7_IO: P1.10 P3.10 RS2.6 RS5.6 | length 214.8
  Bottom Layer w10: RS5.6@-701.17,-305.9 -701.17,-275.17 -679.13,-253.13 P3.10@-679.13,-207.62 ; RS2.6@-701.17,1268.9 -701.17,1299.63 -679.13,1321.67 P1.10@-679.13,1367.19